# EAGLE board halleffectboard (EAGLE 9.7.0)
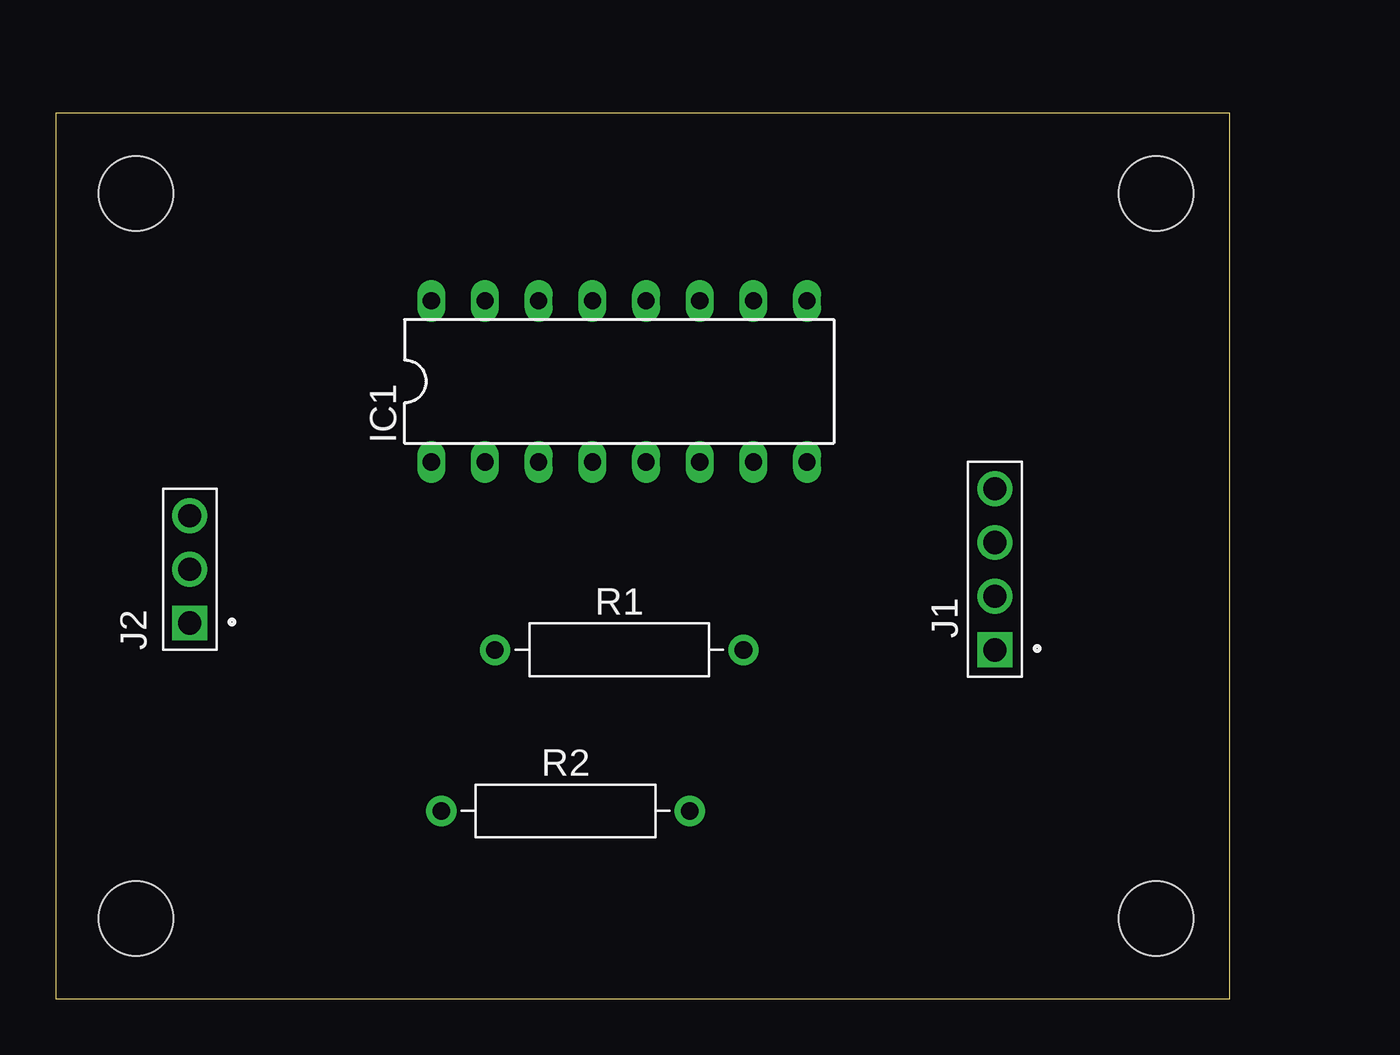
[diagram p0: board, top side]
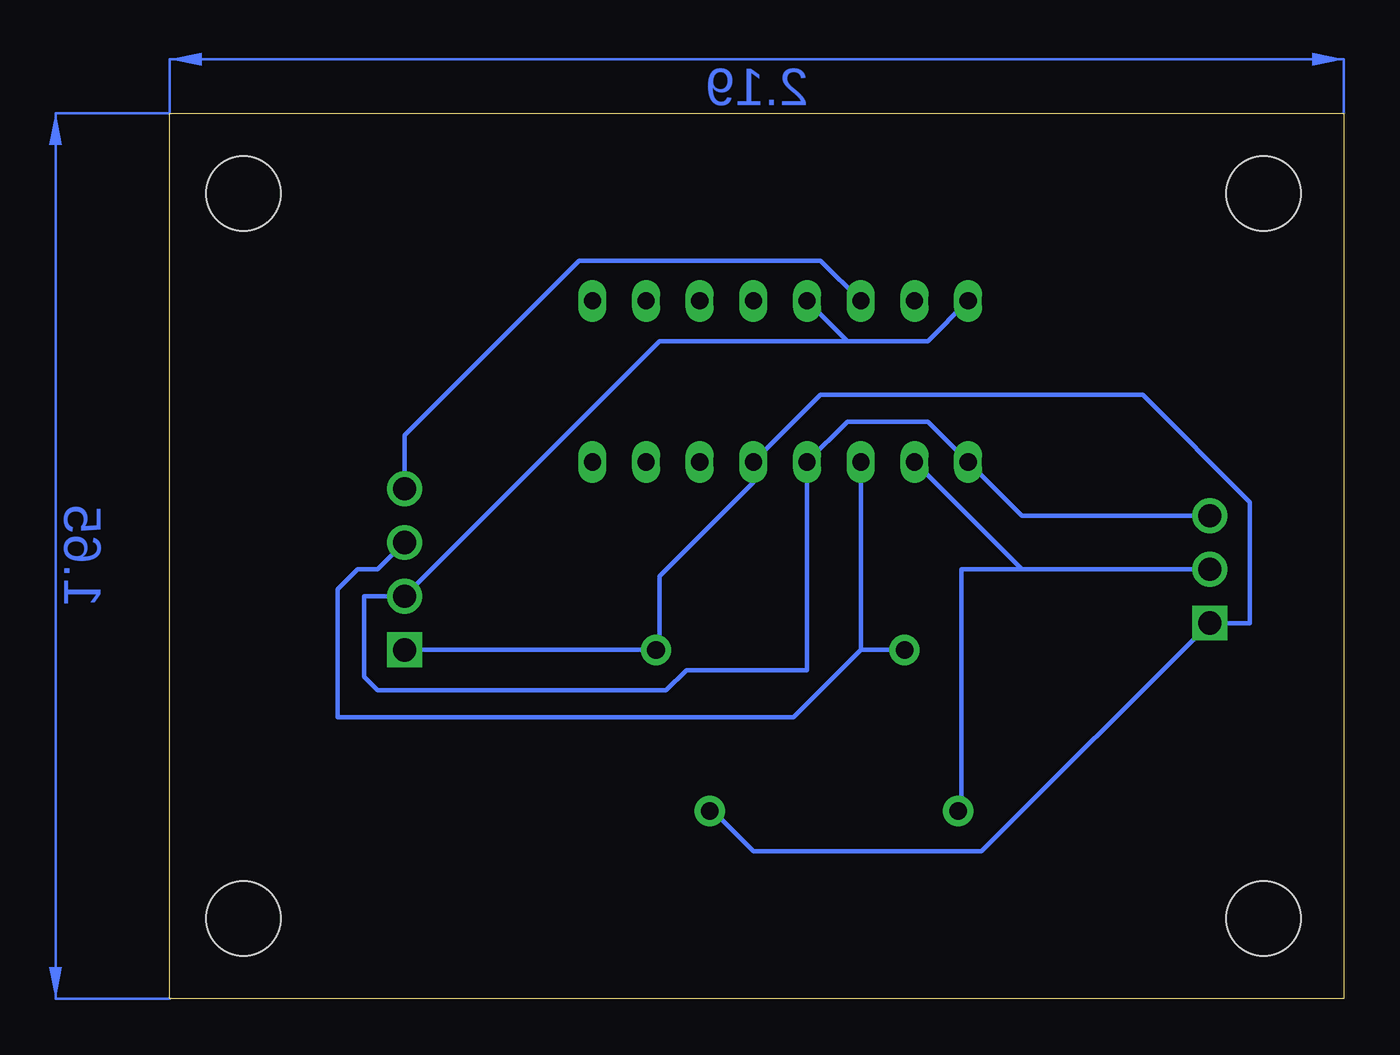
[diagram p1: board, bottom side, seen from below]

Size 55.55 x 41.9 mm. Coordinates in mm from the lower left corner, seen from the top.
Outline: 0,0 55.55,0 55.55,41.9 0,41.9 0,0
Copper layers (1*16): Top 0.035mm / dielectric 1.5mm / Bottom 0.035mm
Design rules "OthermillDRC_1_32_v2": minimum track width 8mil, minimum drill 0.8mm, track to track 0.794003125mm, track to pad 0.794003125mm, pad to pad 0.794003125mm, via to via 0.794003125mm, smd to smd 0mil, copper to edge 0mil, drill to drill 1mil, minimum pad ring 10mil, minimum via ring 10mil, stop-mask expansion 1mil, vias tented up to drill 30mil, thermal gap 10mil
Holes 3.51 mm at 3.81,38.1 3.81,3.81 52.07,38.1 52.07,3.81

## Footprints (pad centres in the part's own frame; a part is rotated, then mirrored left to right if it is on the bottom)
DIL16 = drill 0.813 long: 1 -8.89,-3.81; 2 -6.35,-3.81; 3 -3.81,-3.81; 4 -1.27,-3.81; 5 1.27,-3.81; 6 3.81,-3.81; 7 6.35,-3.81; 8 8.89,-3.81; 9 8.89,3.81; 10 6.35,3.81; 11 3.81,3.81; 12 1.27,3.81; 13 -1.27,3.81; 14 -3.81,3.81; 15 -6.35,3.81; 16 -8.89,3.81
61300411121 = drill 1.1 square: 1 -3.81,0 | drill 1.1: 2 -1.27,0; 3 1.27,0; 4 3.81,0
61300311121 = drill 1.1 square: 1 -2.54,0 | drill 1.1: 2 0,0; 3 2.54,0
RESAD1176W63L850D250B = drill 0.83 pad 1.43: 1 -5.88,0; 2 5.88,0

## Placement (x,y rotation side)
IC1  7476N  [DIL16]  26.67,29.21 0 top
J1  61300411121  [61300411121]  44.45,20.32 90 top
J2  61300311121  [61300311121]  6.35,20.32 90 top
R1  [RESAD1176W63L850D250B]  26.67,16.51 0 top
R2  [RESAD1176W63L850D250B]  24.13,8.89 0 top

## Library data of the parts
IC1 = 74xx-us
J1 = Headers; CREATED_BY: PCBLayout.com; DIGI_KEY_PART_NUMBER: 732-5317-ND; MANUFACTURER: Wurth Electronics Inc.; MPN: 61300411121
J2 = Headers; CREATED_BY: PCBLayout.com; DIGI_KEY_PART_NUMBER: 732-5316-ND; MANUFACTURER: Wurth Electronics Inc.; MPN: 61300311121
R1 R2 = Resistor; CATEGORY: Resistor; SUB-CATEGORY: Fixed

## Nets
CLR: IC1.3 J1.3 R1.1
GND: IC1.1 IC1.4 IC1.13 IC1.16 J1.2 J2.3
HALL: IC1.2 J2.2 R2.1
OUT: IC1.14 J1.4
VCC: IC1.5 J1.1 J2.1 R1.2 R2.2

## Tracks (layer width: path | path; a pad name or v marks a point on that pad's centre or on a via)
CLR
  Bottom 0.203: 22.86,16.51 IC1.3 | R1.1 22.86,16.51 | J1.3 45.72,20.32 46.67,20.32 47.62,19.37 47.62,13.33 26.04,13.33 22.86,16.51
GND
  Bottom 0.203: J2.3 15.24,22.86 IC1.1 19.68,27.3 23.5,27.3 IC1.4 25.4,15.56 31.11,15.56 32.07,14.61 45.72,14.61 46.36,15.24 46.36,19.05 J1.2 32.39,31.11 23.5,31.11 | IC1.16 19.68,31.11 23.5,31.11 | IC1.13 23.5,31.11
HALL
  Bottom 0.203: 15.24,20.32 IC1.2 | J2.2 15.24,20.32 | 15.24,20.32 18.1,20.32 18.1,8.89 R2.1
OUT
  Bottom 0.203: IC1.14 24.77,34.92 36.2,34.92 44.45,26.67 J1.4
VCC
  Bottom 0.203: J1.1 R1.2 32.39,16.51 32.39,20 27.94,24.45 IC1.5 24.77,28.57 9.53,28.57 4.45,23.5 4.45,17.78 J2.1 17.14,6.98 27.94,6.98 29.85,8.89 R2.2
(copper drawn outside any net)
  shapes: Bottom area x2